# EAGLE board CouplerDC_R13_Teflon_Mini (EAGLE 9.2.2)
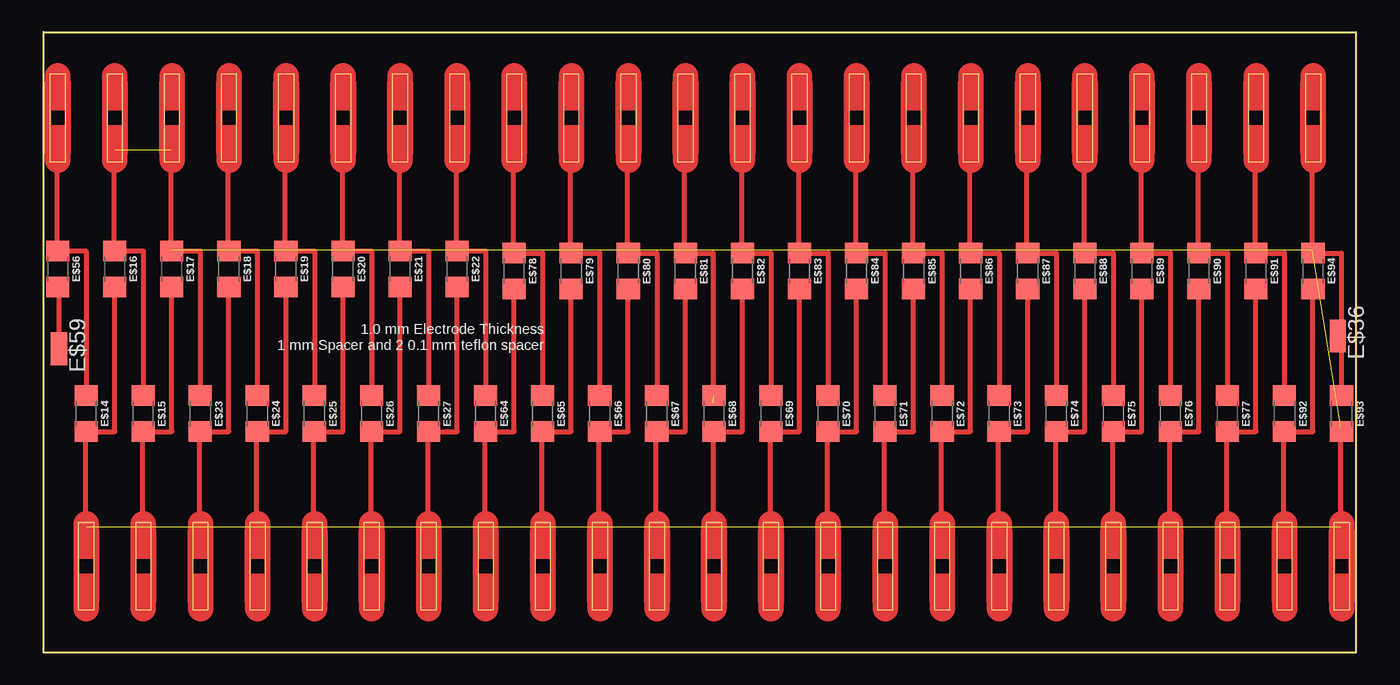
[diagram p0: board, top side]

Size 102.12 x 48.26 mm. Coordinates in mm from the lower left corner, seen from the top.
Outline: 0,48.26 102.12,48.26 102.12,0 0,0 0,48.26
Copper layers (1*16): Top 0.035mm / dielectric 1.5mm / Bottom 0.035mm
Design rules "default": minimum track width 10mil, minimum drill 24mil, track to track 8mil, track to pad 8mil, pad to pad 8mil, via to via 8mil, smd to smd 8mil, copper to edge 40mil, drill to drill 8mil, minimum pad ring 10mil, minimum via ring 8mil, stop-mask expansion 4mil, vias tented up to drill 0mil, thermal gap 10mil
Milling: 4 lines

## Footprints (pad centres in the part's own frame; a part is rotated, then mirrored left to right if it is on the bottom)
1206 = smd 1.6 x 1.8: 1 -1.4,0; 2 1.4,0
SMD1,27-2,54 = smd 1.27 x 2.54: 1 0,0

## Placement (x,y rotation side)
E$1  [GAAEXTENSIONS_SLOT4]  1.11,41.58 90 top
E$2  [GAAEXTENSIONS_SLOT4]  5.55,41.58 90 top
E$3  [GAAEXTENSIONS_SLOT4]  9.99,41.58 90 top
E$4  [GAAEXTENSIONS_SLOT4]  23.31,41.58 90 top
E$5  [GAAEXTENSIONS_SLOT4]  27.75,41.58 90 top
E$6  [GAAEXTENSIONS_SLOT4]  32.19,41.58 90 top
E$7  [GAAEXTENSIONS_SLOT4]  36.63,41.58 90 top
E$8  [GAAEXTENSIONS_SLOT4]  41.07,41.58 90 top
E$9  [GAAEXTENSIONS_SLOT4]  45.51,41.58 90 top
E$10  [GAAEXTENSIONS_SLOT4]  49.95,41.58 90 top
E$11  [GAAEXTENSIONS_SLOT4]  54.39,41.58 90 top
E$12  [GAAEXTENSIONS_SLOT4]  58.83,41.58 90 top
E$13  [GAAEXTENSIONS_SLOT4]  63.27,41.58 90 top
E$14  [1206]  3.32,18.58 270 top
E$15  [1206]  7.76,18.58 270 top
E$16  [1206]  5.54,29.84 270 top
E$17  [1206]  9.98,29.84 270 top
E$18  [1206]  14.42,29.84 270 top
E$19  [1206]  18.86,29.84 270 top
E$20  [1206]  23.3,29.84 270 top
E$21  [1206]  27.74,29.84 270 top
E$22  [1206]  32.18,29.84 270 top
E$23  [1206]  12.2,18.58 270 top
E$24  [1206]  16.64,18.58 270 top
E$25  [1206]  21.08,18.58 270 top
E$26  [1206]  25.52,18.58 270 top
E$27  [1206]  29.96,18.58 270 top
E$28  [GAAEXTENSIONS_SLOT4]  67.71,41.58 90 top
E$29  [GAAEXTENSIONS_SLOT4]  72.15,41.58 90 top
E$30  [GAAEXTENSIONS_SLOT4]  76.59,41.58 90 top
E$31  [GAAEXTENSIONS_SLOT4]  81.03,41.58 90 top
E$32  [GAAEXTENSIONS_SLOT4]  85.47,41.58 90 top
E$33  [GAAEXTENSIONS_SLOT4]  89.91,41.58 90 top
E$34  [GAAEXTENSIONS_SLOT4]  94.35,41.58 90 top
E$35  [GAAEXTENSIONS_SLOT4]  98.79,41.58 90 top
E$36  [SMD1,27-2,54]  100.7,24.63 180 top
E$37  [GAAEXTENSIONS_SLOT4]  3.33,6.71 90 top
E$38  [GAAEXTENSIONS_SLOT4]  7.77,6.71 90 top
E$39  [GAAEXTENSIONS_SLOT4]  12.21,6.71 90 top
E$40  [GAAEXTENSIONS_SLOT4]  16.65,6.71 90 top
E$41  [GAAEXTENSIONS_SLOT4]  21.09,6.71 90 top
E$42  [GAAEXTENSIONS_SLOT4]  25.53,6.71 90 top
E$43  [GAAEXTENSIONS_SLOT4]  29.97,6.71 90 top
E$44  [GAAEXTENSIONS_SLOT4]  34.41,6.71 90 top
E$45  [GAAEXTENSIONS_SLOT4]  38.85,6.71 90 top
E$46  [GAAEXTENSIONS_SLOT4]  43.29,6.71 90 top
E$47  [GAAEXTENSIONS_SLOT4]  47.73,6.71 90 top
E$48  [GAAEXTENSIONS_SLOT4]  52.17,6.71 90 top
E$49  [GAAEXTENSIONS_SLOT4]  56.61,6.71 90 top
E$50  [GAAEXTENSIONS_SLOT4]  61.05,6.71 90 top
E$51  [GAAEXTENSIONS_SLOT4]  65.49,6.71 90 top
E$52  [GAAEXTENSIONS_SLOT4]  69.93,6.71 90 top
E$53  [GAAEXTENSIONS_SLOT4]  74.37,6.71 90 top
E$54  [GAAEXTENSIONS_SLOT4]  78.81,6.71 90 top
E$55  [GAAEXTENSIONS_SLOT4]  83.25,6.71 90 top
E$56  [1206]  1.1,29.84 270 top
E$57  [GAAEXTENSIONS_SLOT4]  87.69,6.71 90 top
E$58  [GAAEXTENSIONS_SLOT4]  92.13,6.71 90 top
E$59  [SMD1,27-2,54]  1.2,23.63 180 top
E$60  [GAAEXTENSIONS_SLOT4]  96.57,6.71 90 top
E$61  [GAAEXTENSIONS_SLOT4]  14.43,41.58 90 top
E$62  [GAAEXTENSIONS_SLOT4]  18.87,41.58 90 top
E$63  [GAAEXTENSIONS_SLOT4]  101.01,6.71 90 top
E$64  [1206]  34.4,18.58 270 top
E$65  [1206]  38.84,18.58 270 top
E$66  [1206]  43.28,18.58 270 top
E$67  [1206]  47.72,18.58 270 top
E$68  [1206]  52.16,18.58 270 top
E$69  [1206]  56.6,18.58 270 top
E$70  [1206]  61.04,18.58 270 top
E$71  [1206]  65.48,18.58 270 top
E$72  [1206]  69.92,18.58 270 top
E$73  [1206]  74.36,18.58 270 top
E$74  [1206]  78.8,18.58 270 top
E$75  [1206]  83.24,18.58 270 top
E$76  [1206]  87.68,18.58 270 top
E$77  [1206]  92.12,18.58 270 top
E$78  [1206]  36.62,29.68 270 top
E$79  [1206]  41.06,29.68 270 top
E$80  [1206]  45.5,29.68 270 top
E$81  [1206]  49.94,29.68 270 top
E$82  [1206]  54.38,29.68 270 top
E$83  [1206]  58.82,29.68 270 top
E$84  [1206]  63.26,29.68 270 top
E$85  [1206]  67.7,29.68 270 top
E$86  [1206]  72.14,29.68 270 top
E$87  [1206]  76.58,29.68 270 top
E$88  [1206]  81.02,29.68 270 top
E$89  [1206]  85.46,29.68 270 top
E$90  [1206]  89.9,29.68 270 top
E$91  [1206]  94.34,29.68 270 top
E$92  [1206]  96.56,18.58 270 top
E$93  [1206]  101,18.58 270 top
E$94  [1206]  98.78,29.68 270 top

## Library data of the parts
E$1-E$13 E$28-E$35 E$37-E$55 E$57 E$58 E$60-E$63 = CouplerDC_v2
E$14-E$27 E$56 E$64-E$94 = SparkFun-Resistors
E$36 E$59 = wirepad

## Nets
S$1: E$14.1 E$56.1
S$11: E$14.2 E$16.2
S$12: E$15.2 E$17.2
S$13: E$18.2 E$23.2
S$14: E$19.2 E$24.2
S$15: E$20.2 E$25.2
S$16: E$21.2 E$26.2
S$17: E$22.2 E$27.2
S$18: E$64.2 E$78.2
S$19: E$65.2 E$79.2
S$20: E$66.2 E$80.2
S$21: E$67.2 E$81.2
S$22: E$15.1 E$16.1
S$23: E$17.1 E$23.1
S$36: E$18.1 E$24.1
S$38: E$19.1 E$25.1
S$39: E$20.1 E$26.1
S$40: E$21.1 E$27.1
S$41: E$22.1 E$64.1
S$42: E$65.1 E$78.1
S$43: E$66.1 E$79.1
S$44: E$67.1 E$80.1
S$45: E$68.1 E$81.1
S$46: E$68.2 E$82.2
S$47: E$69.1 E$82.1
S$48: E$69.2 E$83.2
S$49: E$70.1 E$83.1
S$50: E$70.2 E$84.2
S$52: E$71.1 E$84.1
S$53: E$71.2 E$85.2
S$54: E$72.1 E$85.1
S$55: E$73.1 E$86.1
S$56: E$74.1 E$87.1
S$57: E$75.1 E$88.1
S$58: E$76.1 E$89.1
S$59: E$77.1 E$90.1
S$60: E$91.1 E$92.1
S$61: E$93.1 E$94.1
S$62: E$77.2 E$91.2
S$63: E$76.2 E$90.2
S$64: E$75.2 E$89.2
S$65: E$74.2 E$88.2
S$66: E$73.2 E$87.2
S$67: E$72.2 E$86.2
S$68: E$92.2 E$94.2
S$69: E$93.2
S$70: E$56.2 E$59.1

## Tracks (layer width: path | path; a pad name or v marks a point on that pad's centre or on a via)
S$1
  Top 0.406: E$56.1 3.32,31.24 E$14.1
  Top 1.016: 1.13,31.27 E$56.1
S$10
  Top 0.406: 1.07,30.87 1.07,38.85 0.96,38.85
S$11
  Top 0.406: E$14.2 5.54,17.18 E$16.2
S$12
  Top 0.406: E$15.2 9.98,17.18 E$17.2
S$13
  Top 0.406: E$23.2 14.42,17.18 E$18.2
S$14
  Top 0.406: E$24.2 18.86,17.18 E$19.2
S$15
  Top 0.406: E$25.2 23.3,17.18 E$20.2
S$16
  Top 0.406: E$26.2 27.74,17.18 E$21.2
S$17
  Top 0.406: E$27.2 32.18,17.18 E$22.2
S$18
  Top 0.406: E$64.2 36.62,17.18 E$78.2
S$19
  Top 0.406: E$65.2 41.06,17.18 E$79.2
S$20
  Top 0.406: E$66.2 45.5,17.18 E$80.2
S$21
  Top 0.406: E$67.2 49.94,17.18 E$81.2
S$22
  Top 0.406: E$16.1 7.76,31.24 E$15.1
S$23
  Top 0.406: E$17.1 12.2,31.24 E$23.1
S$36
  Top 0.406: E$18.1 16.64,31.24 E$24.1
S$38
  Top 0.406: E$19.1 21.08,31.24 E$25.1
S$39
  Top 0.406: E$20.1 25.52,31.24 E$26.1
S$40
  Top 0.406: E$21.1 29.96,31.24 E$27.1
S$41
  Top 0.406: E$22.1 34.4,31.24 E$64.1
S$42
  Top 0.406: E$78.1 38.84,31.08 E$65.1
S$43
  Top 0.406: E$79.1 43.28,31.08 E$66.1
S$44
  Top 0.406: E$80.1 47.72,31.08 E$67.1
S$45  (1 unrouted)
  Top 0.406: E$81.1 52.09,31.08 52.09,19.43
S$46
  Top 0.406: E$68.2 54.38,17.18 E$82.2
S$47
  Top 0.406: E$82.1 56.6,31.08 E$69.1
S$48
  Top 0.406: E$69.2 58.82,17.18 E$83.2
S$49
  Top 0.406: E$83.1 61.04,31.08 E$70.1
S$50
  Top 0.406: E$70.2 63.26,17.18 E$84.2
S$52
  Top 0.406: E$84.1 65.48,31.08 E$71.1
S$53
  Top 0.406: E$71.2 67.7,17.18 E$85.2
S$54
  Top 0.406: E$85.1 69.92,31.08 E$72.1
S$55
  Top 0.406: E$86.1 74.36,31.08 E$73.1
S$56
  Top 0.406: E$87.1 78.8,31.08 E$74.1
S$57
  Top 0.406: E$88.1 83.24,31.08 E$75.1
S$58
  Top 0.406: E$89.1 87.68,31.08 E$76.1
S$59
  Top 0.406: E$90.1 92.12,31.08 E$77.1
S$60
  Top 0.406: E$91.1 96.56,31.08 E$92.1
S$61
  Top 0.406: E$94.1 101,31.08 E$93.1
S$62
  Top 0.406: E$77.2 94.34,17.18 E$91.2
S$63
  Top 0.406: E$76.2 89.9,17.18 E$90.2
S$64
  Top 0.406: E$75.2 85.46,17.18 E$89.2
S$65
  Top 0.406: E$74.2 81.02,17.18 E$88.2
S$66
  Top 0.406: E$73.2 76.58,17.18 E$87.2
S$67
  Top 0.406: E$72.2 72.14,17.18 E$86.2
S$68
  Top 0.406: E$92.2 98.78,17.18 E$94.2
S$70
  Top 0.406: E$59.1 1.2,28.44 E$56.2
S$71  (44 unrouted)
  Top 0.406: 5.49,31.35 5.49,39.11 5.56,39.11 | 9.93,31.35 9.93,39.11 | 14.37,31.35 14.37,39.11 | 18.81,31.35 18.81,39.11 | 23.25,31.35 23.25,39.11 | 27.69,31.35 27.69,39.11 | 32.13,31.35 32.13,39.11 | 36.57,31.35 36.57,39.11 | 41.01,31.35 41.01,39.11 | 45.45,31.35 45.45,39.11 | 49.89,31.35 49.89,39.11 | 54.33,31.35 54.33,39.11 | 58.77,31.35 58.77,39.11 | 63.21,31.35 63.21,39.11 | 3.27,9.8 3.27,17.56 | 7.71,9.8 7.71,17.56 | 12.15,9.8 12.15,17.56 | 16.59,9.8 16.59,17.56 | 21.03,9.8 21.03,17.56 | 25.47,9.8 25.47,17.56 | 29.91,9.8 29.91,17.56 | 34.35,9.8 34.35,17.56 | 38.79,9.8 38.79,17.56 | 43.23,9.8 43.23,17.56 | 47.67,9.8 47.67,17.56 | 52.11,9.8 52.11,17.56 | 56.55,9.8 56.55,17.56 | 60.99,9.8 60.99,17.56 | 65.43,9.8 65.43,17.56 | 69.87,9.8 69.87,17.56 | 74.31,9.8 74.31,17.56 | 78.75,9.8 78.75,17.56 | 67.65,31.35 67.65,39.11 | 72.09,31.35 72.09,39.11 | 76.53,31.35 76.53,39.11 | 80.97,31.35 80.97,39.11 | 85.41,31.35 85.41,39.11 | 89.85,31.35 89.85,39.11 | 94.29,31.35 94.29,39.11 | 98.73,31.35 98.73,39.11 | 100.95,9.8 100.95,17.56 | 96.51,9.8 96.51,17.56 | 92.07,9.8 92.07,17.56 | 87.63,9.8 87.63,17.56 | 83.19,9.8 83.19,17.56

## Text on the board
tPlace: 1.0 mm Electrode Thickness / 1 mm Spacer and 2 0.1 mm teflon spacer